# EAGLE board NanoRemotev2 (EAGLE 6.1)
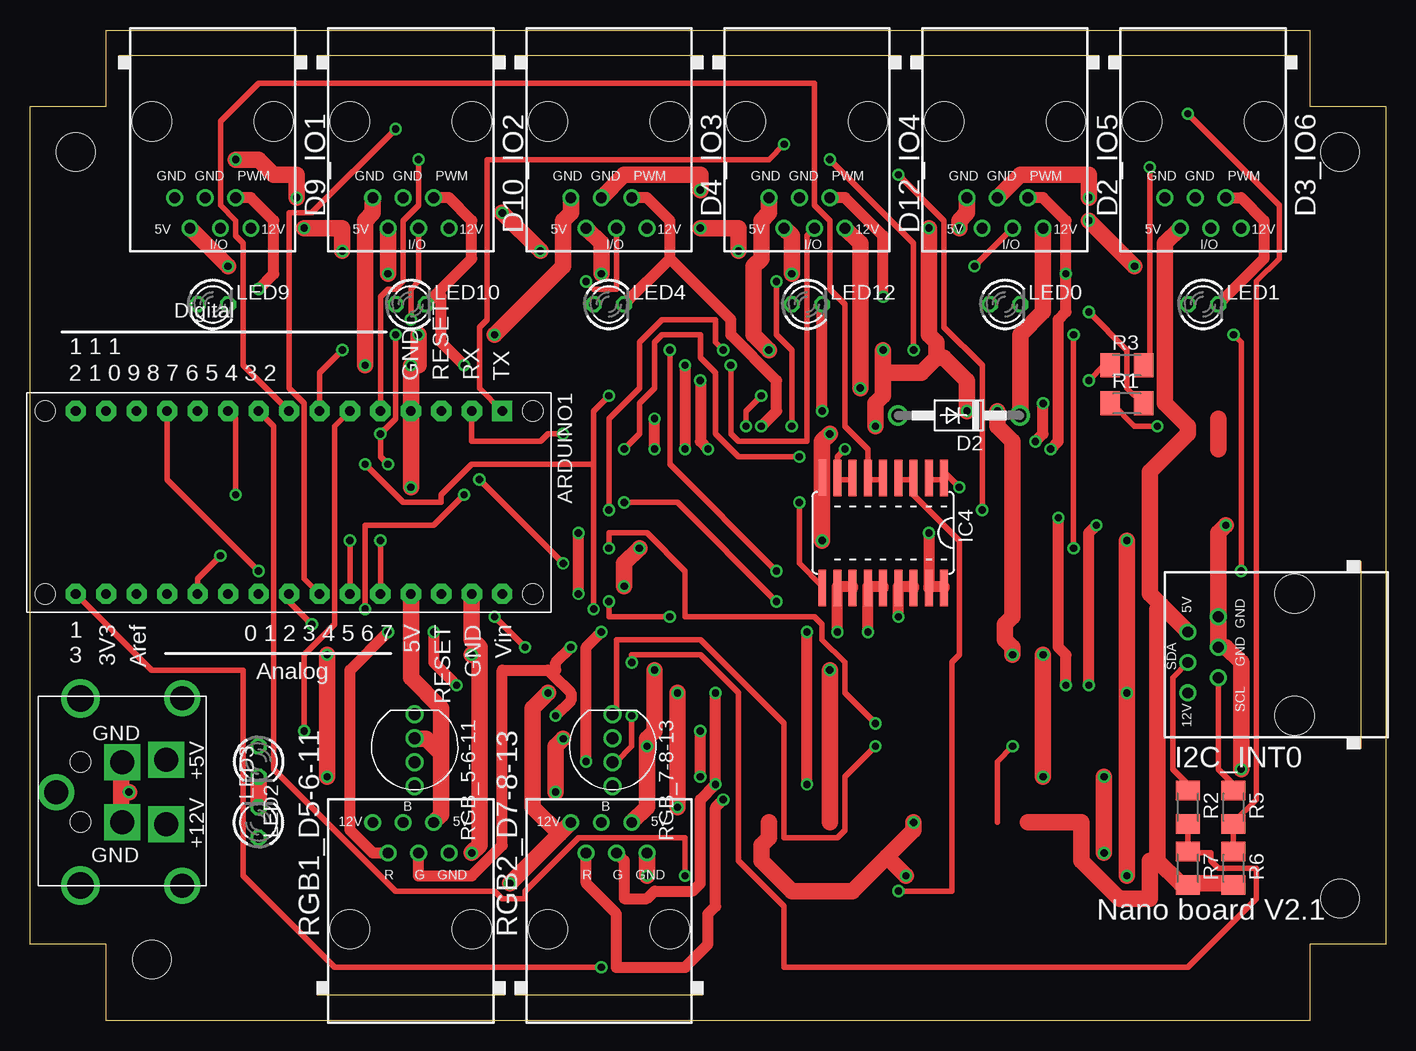
[diagram p0: board, top side]
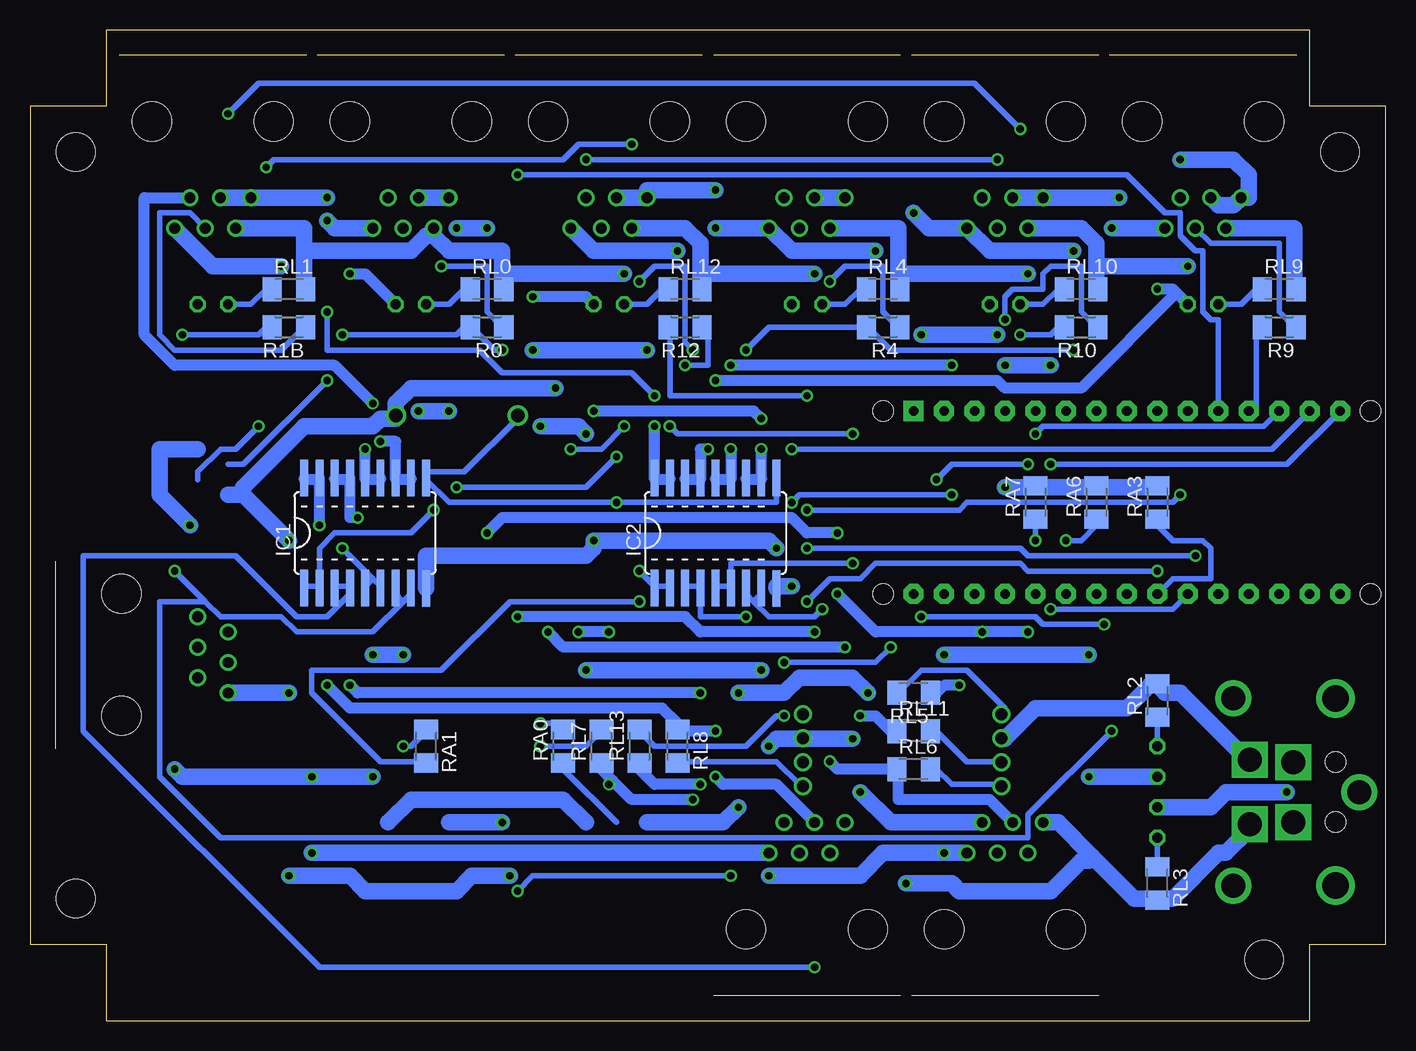
[diagram p1: board, bottom side, seen from below]

Size 113.03 x 82.55 mm. Coordinates in mm from the lower left corner, seen from the top.
Outline: 6.35,82.55 106.68,82.55 106.68,76.2 113.03,76.2 113.03,6.35 106.68,6.35 106.68,0 6.35,0 6.35,6.35 0,6.35 0,76.2 6.35,76.2 6.35,82.55
Copper layers (1*16): Top 0.035mm / dielectric 1.5mm / Bottom 0.035mm
Design rules: minimum track width 10mil, minimum drill 24mil, track to track 8mil, track to pad 8mil, pad to pad 8mil, via to via 8mil, smd to smd 8mil, copper to edge 40mil, drill to drill 8mil, minimum pad ring 10mil, minimum via ring 8mil, stop-mask expansion 4mil, vias tented up to drill 0mil, thermal gap 10mil
Net classes: 0 default: width 0.457 mm; 1 power: width 0.914 mm; 2 highpower: width 1.372 mm
Holes 3.2 mm at 3.81,72.39 10.16,5.08 109.22,10.16 109.22,72.39
Milling: 12 lines

## Footprints (pad centres in the part's own frame; a part is rotated, then mirrored left to right if it is on the bottom)
ARDUINO_NANO = drill 0.8 pad 1.676 square: 1 0,-2.54 | drill 0.8 pad 1.676 octagon: 2 0,-5.08; 3 0,-7.62; 4 0,-10.16; 5 0,-12.7; 6 0,-15.24; 7 0,-17.78; 8 0,-20.32; 9 0,-22.86; 10 0,-25.4; 11 0,-27.94; 12 0,-30.48; 13 0,-33.02; 14 0,-35.56; 15 0,-38.1; 16 15.24,-38.1; 17 15.24,-35.56; 18 15.24,-33.02; 19 15.24,-30.48; 20 15.24,-27.94; 21 15.24,-25.4; 22 15.24,-22.86; 23 15.24,-20.32; 24 15.24,-17.78; 25 15.24,-15.24; 26 15.24,-12.7; 27 15.24,-10.16; 28 15.24,-7.62; 29 15.24,-5.08; 30 15.24,-2.54 | hole 1.676: 0,0; 0,-40.64; 15.24,-40.64; 15.24,0
DO41-10 = drill 1.118: A 5.08,0; C -5.08,0
RJ12-STRAIGHT = drill 0.9 pad 1.4: +5V 1.905,8.89; +12V -3.175,8.89; GND1 3.175,6.35; GND2 0.635,6.35; I/O -0.635,8.89; PWM -1.905,6.35 | hole 3.251: -5.08,0; 5.08,0
RJ12-STRAIGHT-I2C = drill 0.9 pad 1.4: +5V 1.905,8.89; +12V -3.175,8.89; GND1 3.175,6.35; GND2 0.635,6.35; SCL -1.905,6.35; SDA -0.635,8.89 | hole 3.251: -5.08,0; 5.08,0
SO18W = smd 0.66 x 3.048: 1 -5.08,-4.585; 2 -3.81,-4.585; 3 -2.54,-4.585; 4 -1.27,-4.585; 5 0,-4.585; 6 1.27,-4.585; 7 2.54,-4.585; 8 3.81,-4.585; 9 5.08,-4.623; 10 5.08,4.585; 11 3.81,4.585; 12 2.54,4.585; 13 1.27,4.585; 14 0,4.585; 15 -1.27,4.585; 16 -2.54,4.585; 17 -3.81,4.585; 18 -5.08,4.585
LED3MM = drill 0.813 octagon: A -1.27,0; K 1.27,0
M1206 = smd 1.6 x 2: 1 -1.4,0; 2 1.4,0
RJ12-STRAIGHT-RGB = drill 0.9 pad 1.4: +5V 1.905,8.89; +12V -3.175,8.89; B -0.635,8.89; G 0.635,6.35; GND1 3.175,6.35; R -1.905,6.35 | hole 3.251: -5.08,0; 5.08,0
LED-TRICOLOR-THROUGHHOLE = drill 1: BLU 3,0; GND -1,0; GRN 1,0; RED -3,0
KPJX-4S-S = drill 2 square: +5V 2.7,1.35; +12V -2.7,1.35; GND1 -2.5,5; GND2 2.5,5 | drill 2: P$1 -7.8,0; P$2 7.8,0; P$11 0,10.5 | drill 2.2: P$3 -7.8,8.5; P$4 7.8,8.5 | hole 1.7: -2.5,8.5; 2.5,8.5

## Placement (x,y rotation side)
ARDUINO1  ARDUINO_NANO  [ARDUINO_NANO]  41.91,50.8 270 top
D2  1N4004  [DO41-10]  77.44,50.43 180 top
D2_IO5  IO5  [RJ12-STRAIGHT]  81.28,74.93 180 top
D3_IO6  IO6  [RJ12-STRAIGHT]  97.79,74.93 180 top
D4_IO3  IO3  [RJ12-STRAIGHT]  48.26,74.93 180 top
D9_IO1  IO1  [RJ12-STRAIGHT]  15.24,74.93 180 top
D10_IO2  IO2  [RJ12-STRAIGHT]  31.75,74.93 180 top
D12_IO4  IO4  [RJ12-STRAIGHT]  64.77,74.93 180 top
I2C_INT0  I2C  [RJ12-STRAIGHT-I2C]  105.41,30.48 90 top
IC1  ULN2803A  [SO18W]  85.09,40.64 0 bottom
IC2  ULN2803A  [SO18W]  55.88,40.64 0 bottom
IC4  ULN2803A  [SO18W]  71.12,40.64 180 top
LED0  [LED3MM]  81.28,59.69 0 top
LED1  [LED3MM]  97.79,59.69 0 top
LED2  [LED3MM]  19.05,21.59 270 top
LED3  [LED3MM]  19.05,16.51 90 top
LED4  [LED3MM]  48.26,59.69 0 top
LED9  [LED3MM]  15.24,59.69 0 top
LED10  [LED3MM]  31.75,59.69 0 top
LED12  [LED3MM]  64.77,59.69 0 top
R0  1K  [M1206]  74.93,57.78 180 bottom
R1  1K  [M1206]  91.44,51.44 0 top
R1B  1K  [M1206]  91.44,57.78 180 bottom
R2  1K  [M1206]  96.52,17.78 270 top
R3  1K  [M1206]  91.44,54.61 0 top
R4  1K  [M1206]  41.91,57.78 180 bottom
R5  1K  [M1206]  100.33,17.78 270 top
R6  10K  [M1206]  100.33,12.7 270 top
R7  10K  [M1206]  96.52,12.7 270 top
R9  1K  [M1206]  8.89,57.78 180 bottom
R10  1K  [M1206]  25.4,57.78 180 bottom
R12  1K  [M1206]  58.42,57.78 180 bottom
RA0  1K  [M1206]  68.58,22.86 90 bottom
RA1  1K  [M1206]  80.01,22.86 270 bottom
RA3  10K  [M1206]  19.05,43.18 90 bottom
RA6  10K  [M1206]  24.13,43.18 90 bottom
RA7  10K  [M1206]  29.21,43.18 90 bottom
RGB1_D5-6-11  RGB1  [RJ12-STRAIGHT-RGB]  31.75,7.62 0 top
RGB2_D7-8-13  RGB2  [RJ12-STRAIGHT-RGB]  48.26,7.62 0 top
RGB_5-6-11  [LED-TRICOLOR-THROUGHHOLE]  32.07,22.54 270 top
RGB_7-8-13  [LED-TRICOLOR-THROUGHHOLE]  48.58,22.54 270 top
RL0  1K  [M1206]  74.93,60.96 0 bottom
RL1  1K  [M1206]  91.44,60.96 0 bottom
RL2  1K  [M1206]  19.05,26.67 90 bottom
RL3  1K  [M1206]  19.05,11.43 270 bottom
RL4  1K  [M1206]  41.91,60.96 0 bottom
RL5  1K  [M1206]  39.37,27.3 180 bottom
RL6  1K  [M1206]  39.37,20.95 0 bottom
RL7  1K  [M1206]  65.41,22.86 90 bottom
RL8  1K  [M1206]  59.05,22.86 270 bottom
RL9  1K  [M1206]  8.89,60.96 0 bottom
RL10  1K  [M1206]  25.4,60.96 0 bottom
RL11  1K  [M1206]  39.37,24.13 0 bottom
RL12  1K  [M1206]  58.42,60.96 0 bottom
RL13  1K  [M1206]  62.23,22.86 90 bottom
U$1  KPJX-4S-S  [KPJX-4S-S]  12.7,19.05 90 top

## Library data of the parts
ARDUINO1 = arduino
D2 = diode
D2_IO5 D3_IO6 D4_IO3 D9_IO1 D10_IO2 D12_IO4 I2C_INT0 IC1 IC2 IC4 LED0 LED1-LED4 LED9 LED10 LED12 RGB1_D5-6-11 RGB2_D7-8-13 RGB_5-6-11 RGB_7-8-13 U$1 = lpatiny
R0 R1 R1B R2-R7 R9 R10 R12 RA0 RA1 RA3 RA6 RA7 RL0 RL1-RL13 = resistor

## Nets
3V3: ARDUINO1.17
+5V [highpower]: ARDUINO1.27 D2_IO5.+5V D3_IO6.+5V D4_IO3.+5V D9_IO1.+5V D10_IO2.+5V D12_IO4.+5V I2C_INT0.+5V R6.2 R7.2 RGB1_D5-6-11.+5V RGB2_D7-8-13.+5V RGB_5-6-11.GND RGB_7-8-13.GND RL0.2 RL1.2 RL2.2 RL4.2 RL9.2 RL10.2 RL12.2 U$1.+5V
+12V [highpower]: D2.C D2_IO5.+12V D3_IO6.+12V D4_IO3.+12V D9_IO1.+12V D10_IO2.+12V D12_IO4.+12V I2C_INT0.+12V RGB1_D5-6-11.+12V RGB2_D7-8-13.+12V RL3.2 U$1.+12V
A0: ARDUINO1.19
A1: ARDUINO1.20 RA0.2
A2: ARDUINO1.21 RA1.2
COM: D2.A IC1.10 IC2.10 IC4.10
D2: ARDUINO1.5 IC1.5 IC1.6 R0.2
D2B: D4_IO3.I/O R4.1
D2B1: D9_IO1.I/O R9.1
D2B2: D10_IO2.I/O R10.1
D2B3: D12_IO4.I/O R12.1
D2B4: I2C_INT0.SDA R2.1
D2B5: R3.1
D2B6: D2_IO5.I/O R0.1
D2B7: D3_IO6.I/O R1B.1
D2B8: RA0.1
D2B9: RA1.1
D3: ARDUINO1.6 IC1.7 IC1.8 R1B.2
D4: ARDUINO1.7 IC2.1 IC2.2 R4.2
D5: ARDUINO1.8 IC4.5 IC4.6
D6: ARDUINO1.9 IC4.3 IC4.4
D7: ARDUINO1.10 IC4.7 IC4.8
D8: ARDUINO1.11 IC1.1 IC1.2
D9: ARDUINO1.12 IC2.3 IC2.4 R9.2
D10: ARDUINO1.13 IC2.5 IC2.6 R10.2
D11: ARDUINO1.14 IC4.1 IC4.2
D12: ARDUINO1.15 IC2.7 IC2.8 R12.2
D13: ARDUINO1.16 IC1.3 IC1.4
GND [highpower]: ARDUINO1.4 ARDUINO1.29 D2_IO5.GND1 D2_IO5.GND2 D3_IO6.GND1 D3_IO6.GND2 D4_IO3.GND1 D4_IO3.GND2 D9_IO1.GND1 D9_IO1.GND2 D10_IO2.GND1 D10_IO2.GND2 D12_IO4.GND1 D12_IO4.GND2 I2C_INT0.GND1 I2C_INT0.GND2 IC1.9 IC2.9 IC4.9 LED2.K LED3.K RA3.2 RA6.2 RA7.2 RGB1_D5-6-11.GND1 RGB2_D7-8-13.GND1 U$1.GND1 U$1.GND2
N$1: RGB_5-6-11.RED RL5.2
N$2: RGB_5-6-11.BLU RL6.2
N$3 [power]: IC1.17 IC1.18 RGB2_D7-8-13.B RL8.1
N$4: RGB_5-6-11.GRN RL11.2
N$5 [power]: IC4.17 IC4.18 RGB1_D5-6-11.R RL5.1
N$6 [power]: IC4.15 IC4.16 RGB1_D5-6-11.B RL6.1
N$7: R1.1
N$8: I2C_INT0.SCL R5.1
N$9: RGB_7-8-13.RED RL7.2
N$11: RGB_7-8-13.BLU RL8.2
N$12: LED9.A RL9.1
N$13: LED3.A RL3.1
N$14: RGB_7-8-13.GRN RL13.2
N$15: LED4.A RL4.1
N$16: ARDUINO1.22 RA3.1
N$17 [power]: IC4.13 IC4.14 RGB1_D5-6-11.G RL11.1
N$18 [power]: D4_IO3.PWM IC2.17 IC2.18 LED4.K
N$19 [power]: IC4.11 IC4.12 RGB2_D7-8-13.R RL7.1
N$20: ARDUINO1.25 RA6.1
N$21: LED10.A RL10.1
N$22: ARDUINO1.26 RA7.1
N$23: LED2.A RL2.1
N$24 [power]: D10_IO2.PWM IC2.13 IC2.14 LED10.K
N$28: LED12.A RL12.1
N$29 [power]: IC1.15 IC1.16 RGB2_D7-8-13.G RL13.1
N$35 [power]: D3_IO6.PWM IC1.11 IC1.12 LED1.K
N$38: LED0.A RL0.1
N$40 [power]: D2_IO5.PWM IC1.13 IC1.14 LED0.K
N$41: LED1.A RL1.1
N$42 [power]: D9_IO1.PWM IC2.15 IC2.16 LED9.K
N$44 [power]: D12_IO4.PWM IC2.11 IC2.12 LED12.K
RX: ARDUINO1.2 R1.2
SCL: ARDUINO1.24 R5.2 R6.1
SDA: ARDUINO1.23 R2.2 R7.1
TX: ARDUINO1.1 R3.2

## Tracks (layer width: path | path; a pad name or v marks a point on that pad's centre or on a via)
+5V  (via drill 0.61)  (2 unrouted)
  Top 1.372: RGB2_D7-8-13.+5V 51.44,17.78 v51.44,22.86 51.44,23.5 52.07,24.13 v52.07,29.21 | RGB1_D5-6-11.+5V 34.29,17.14 34.29,22.23 | 34.29,22.23 33.02,23.5 32.38,23.5 RGB_5-6-11.GND | ARDUINO1.27 31.75,28.57 34.29,26.04 34.29,22.23 | v44.45,23.5 43.82,22.86 v43.82,19.05 | v16.51,62.87 D9_IO1.+5V | D4_IO3.+5V 47.62,64.77 v47.62,62.23 | v29.84,62.23 D10_IO2.+5V | R6.2 100.33,11.43 96.52,11.43 R7.2 95.88,11.43 93.98,13.34 | 94.3,34.61 93.34,35.56 93.34,45.72 96.52,48.9 96.52,49.53 94.61,51.44 94.61,64.77 D3_IO6.+5V | 94.3,34.61 I2C_INT0.+5V | 93.98,13.34 93.98,34.29 94.3,34.61 | 83.19,16.51 87.63,16.51 87.63,13.34 90.8,10.16 93.34,10.16 93.34,13.34 93.98,13.34 | D12_IO4.+5V 63.5,65.41 v63.5,62.23 | v66.67,29.21 66.67,16.51
  Bottom 1.372: U$1.+5V 11.43,22.23 12.06,22.23 17.14,27.3 18.41,27.3 19.05,27.94 RL2.2 19.68,27.94 21.59,26.04 29.21,26.04 31.75,23.5 RGB_5-6-11.GND | v51.44,22.86 50.8,23.5 48.9,23.5 RGB_7-8-13.GND 48.26,23.5 v44.45,23.5 | v43.82,19.05 41.28,16.51 RGB1_D5-6-11.+5V | D9_IO1.+5V 7.62,66.04 7.62,60.96 RL9.2 | 24.13,62.87 24.13,64.77 25.4,66.04 D10_IO2.+5V | 24.13,62.87 24.13,60.96 RL10.2 | 24.13,62.87 v16.51,62.87 | 40.64,62.23 40.64,66.04 D4_IO3.+5V | 40.64,62.23 40.64,60.96 RL4.2 | 57.15,62.23 57.15,64.77 58.42,66.04 D12_IO4.+5V | 57.15,62.23 57.15,60.96 RL12.2 | 57.15,62.23 v47.62,62.23 | 40.64,62.23 v29.84,62.23 | 73.66,62.23 73.66,64.14 78.1,64.14 79.38,65.41 | 73.66,62.23 73.66,60.96 RL0.2 | 79.38,65.41 D2_IO5.+5V | 90.17,64.14 90.17,66.04 D3_IO6.+5V | 90.17,64.14 90.17,60.96 RL1.2 | 79.38,65.41 80.01,65.41 81.28,64.14 90.17,64.14 | 66.67,16.51 68.58,18.41 81.28,18.41 83.19,16.51 | 73.66,62.23 v63.5,62.23 | v52.07,29.21 v66.67,29.21
+12V  (via drill 0.61)  (1 unrouted)
  Top 1.372: v40.01,11.43 44.13,15.56 | 44.13,15.56 RGB2_D7-8-13.+12V | v22.86,66.04 26.04,66.04 v26.04,64.14 | v42.55,64.14 v39.37,67.31 | 61.6,16.51 61.6,15.24 60.96,14.61 60.96,13.34 63.5,10.79 68.58,10.79 71.44,13.65 | 71.44,13.65 73.66,15.88 v73.66,16.51 | v91.44,40.01 v91.44,27.3 v91.44,12.06 | D12_IO4.+12V 69.21,64.77 v69.21,52.7 | D2_IO5.+12V 84.45,59.05 82.55,57.15 82.55,50.8 D2.C | v88.27,66.67 v92.08,62.87 | 71.44,13.65 v73.02,12.06 | v55.88,66.04 59.05,66.04 v59.05,64.14 | v43.18,27.3 41.91,26.04 41.91,17.78 44.13,15.56 | v53.98,27.3 v53.98,17.78
  Bottom 1.372: 24.45,13.65 27.3,16.51 RGB1_D5-6-11.+12V | 24.45,13.65 20.95,10.16 19.05,10.16 RL3.2 18.41,10.16 17.78,10.16 13.97,13.97 13.33,13.97 11.43,15.88 U$1.+12V | v40.01,11.43 36.2,11.43 35.56,10.79 27.94,10.79 25.4,13.34 24.77,13.34 24.45,13.65 | v22.86,66.04 D9_IO1.+12V | v26.04,64.14 33.02,64.14 D10_IO2.+12V 38.1,66.04 v39.37,67.31 | v42.55,64.14 49.53,64.14 D4_IO3.+12V v55.88,66.04 | v73.66,16.51 78.1,16.51 | v91.44,27.3 I2C_INT0.+12V | v91.44,40.01 95.25,43.81 | 95.25,43.81 96.52,43.81 | v69.21,52.7 81.28,52.7 82.55,51.44 82.55,50.8 D2.C 82.55,50.16 83.82,50.16 84.45,49.53 90.17,49.53 95.25,44.45 95.25,43.81 | D3_IO6.+12V 97.79,62.87 v92.08,62.87 | v88.27,66.67 87.63,66.04 D2_IO5.+12V | v73.02,12.06 76.2,12.06 77.47,10.79 85.09,10.79 86.36,12.06 v91.44,12.06 | v59.05,64.14 66.04,64.14 D12_IO4.+12V | v43.18,27.3 44.45,28.57 48.9,28.57 50.17,27.3 v53.98,27.3 | v53.98,17.78 55.25,16.51 61.6,16.51
A1  (via drill 0.61)
  Top 0.457: v70.48,24.77 67.94,27.3 67.94,29.84 66.04,31.75 66.04,33.02 65.41,33.66 54.61,33.66 54.61,37.47 51.44,40.64 48.26,40.64 v48.26,39.37 | v15.88,38.73 13.97,36.83 ARDUINO1.20
  Bottom 0.457: v70.48,24.77 68.58,24.77 RA0.2 | v48.26,39.37 30.48,39.37 29.84,38.73 v15.88,38.73
A2  (via drill 0.61)
  Top 0.457: v62.23,34.92 53.98,43.18 v49.53,43.18 | v36.2,43.81 33.66,41.27 27.94,41.27 v27.94,34.29
  Bottom 0.457: v62.23,34.92 73.02,34.92 78.74,29.21 89.53,29.21 89.53,27.3 83.82,21.59 80.01,21.59 RA1.2 | v49.53,43.18 48.9,43.81 v36.2,43.81 | v27.94,34.29 17.78,34.29 ARDUINO1.21
COM  (via drill 0.61)
  Top 0.457: v64.14,43.18 64.14,38.1 66.04,36.2 IC4.10
  Bottom 0.457: IC2.10 50.8,43.18 v64.14,43.18 78.1,43.18 80.01,45.09 IC1.10 80.01,45.72 76.83,45.72 72.39,50.16 D2.A
D2  (via drill 0.61)
  Top 0.457: v86.99,57.15 v86.99,39.37 | ARDUINO1.5 29.21,60.33 29.84,60.96 30.48,60.96 31.11,61.59 31.11,66.67 32.38,67.94 v32.38,71.75 | v66.67,71.75 73.66,64.77 v73.66,55.88
  Bottom 0.457: v86.99,57.15 77.47,57.15 76.83,57.78 R0.2 76.2,57.78 74.3,55.88 v73.66,55.88 | 84.45,36.83 83.82,36.2 IC1.6 | v86.99,39.37 84.45,36.83 | 84.45,36.83 85.09,36.2 IC1.5 | v32.38,71.75 v66.67,71.75
D2B  (via drill 0.61)
  Top 0.457: v46.36,61.59 46.99,60.96 48.9,60.96 D4_IO3.I/O
  Bottom 0.457: v46.36,61.59 45.09,62.87 41.91,62.87 41.91,59.05 40.64,57.78 R4.1
D2B1
  Bottom 0.457: D9_IO1.I/O 14.61,64.77 8.89,64.77 8.89,59.05 7.62,57.78 R9.1
D2B2  (via drill 0.61)
  Top 0.457: v31.75,58.42 31.75,60.96 32.38,61.59 D10_IO2.I/O
  Bottom 0.457: v31.75,58.42 31.75,60.33 31.11,60.96 28.57,60.96 28.57,62.23 27.94,62.87 25.4,62.87 25.4,59.05 24.13,57.78 R10.1
D2B3  (via drill 0.61)
  Top 0.457: v58.42,54.61 58.42,48.9 59.05,48.26 64.77,48.26 64.77,65.41 D12_IO4.I/O
  Bottom 0.457: v58.42,54.61 56.52,54.61 56.52,57.78 R12.1
D2B4
  Top 0.457: I2C_INT0.SDA 95.25,28.57 95.25,20.95 96.52,19.68 R2.1
D2B5  (via drill 0.61)
  Top 0.457: v88.27,53.34 89.53,54.61 R3.1
  Bottom 0.457: v88.27,53.34 95.25,46.35 96.52,46.35
D2B6  (via drill 0.61)
  Top 0.457: v78.74,62.87 D2_IO5.I/O
  Bottom 0.457: v78.74,62.87 74.93,62.87 74.93,59.05 73.66,57.78 R0.1
D2B7
  Bottom 0.457: D3_IO6.I/O 99.69,67.31 102.23,67.31 102.23,57.15 100.96,55.88 92.08,55.88 90.17,57.78 R1B.1
D2B8
  Bottom 0.457: 64.14,16.51 68.58,20.95 RA0.1
D2B9  (via drill 0.61)
  Top 0.457: v81.91,22.86 80.64,21.59 80.64,16.51
  Bottom 0.457: v81.91,22.86 81.28,22.86 80.01,24.13 RA1.1
D3  (via drill 0.61)
  Top 0.457: v100.33,57.15 100.96,56.52 v100.96,37.47 | ARDUINO1.6 25.4,49.53 25.4,33.02 22.86,30.48 v22.86,24.13
  Bottom 0.457: v100.33,57.15 93.98,57.15 93.34,57.78 R1B.2 | 98.42,34.92 97.16,33.66 92.08,33.66 90.8,32.38 84.45,32.38 81.91,34.92 | 98.42,34.92 v100.96,37.47 | 81.91,34.92 81.28,35.56 IC1.8 | 81.91,34.92 82.55,35.56 IC1.7 | v22.86,24.13 29.84,17.14 29.84,15.24 97.16,15.24 102.23,20.32 102.23,34.92 98.42,34.92
D4  (via drill 0.61)
  Top 0.457: v26.04,55.88 24.13,53.98 ARDUINO1.7 | v62.23,37.47 53.34,46.35 v53.34,55.88
  Bottom 0.457: 60.96,36.2 59.69,36.2 IC2.2 | v26.04,55.88 41.28,55.88 43.18,57.78 R4.2 51.44,57.78 v53.34,55.88 | v62.23,37.47 60.96,36.2 | 60.96,36.2 IC2.1
D5
  Top 0.457: IC4.5 71.12,45.09 69.85,45.09 IC4.6 69.85,47.62 67.94,49.53 67.94,59.69 66.67,60.96 66.67,66.67 65.41,67.94 65.41,78.11 19.05,78.11 15.88,74.93 15.88,67.94 17.14,66.67 17.14,65.41 17.78,64.77 17.78,54.61 ARDUINO1.8
D6  (via drill 0.61)
  Top 0.457: 73.66,45.09 72.39,45.09 IC4.4 | ARDUINO1.9 20.32,49.53 20.32,20.95 30.48,10.79 38.74,10.79 39.37,10.16 41.28,10.16 41.28,10.79 45.72,15.24 54.61,15.24 v54.61,12.06 | v72.39,10.79 76.83,10.79 76.83,29.84 77.47,30.48 77.47,40.01 73.66,43.81 73.66,45.09 | 73.66,45.09 IC4.3
  Bottom 0.457: v54.61,12.06 71.12,12.06 v72.39,10.79
D7  (via drill 0.61)
  Top 0.457: IC4.7 68.58,45.09 67.31,45.09 IC4.8 67.31,46.99 v67.94,47.62 | ARDUINO1.10 17.14,50.16 v17.14,43.81 | v48.26,42.55 48.26,50.16 50.8,52.7 50.8,56.52 52.71,58.42 57.15,58.42 57.15,56.52 v57.79,55.88 | v62.23,61.59 62.23,57.15 63.5,55.88 v63.5,49.53
  Bottom 0.457: v17.14,43.81 17.78,43.18 34.93,43.18 35.56,42.55 v48.26,42.55 | v57.79,55.88 58.42,56.52 58.42,62.87 60.96,62.87 v62.23,61.59 | v63.5,49.53 65.41,47.62 v67.94,47.62
D8  (via drill 0.61)
  Top 0.457: v72.39,70.48 76.2,66.67 76.2,57.78 79.38,54.61 v79.38,42.55
  Bottom 0.457: 88.9,36.2 90.17,36.2 IC1.1 | ARDUINO1.11 13.97,58.42 14.61,58.42 15.24,59.05 15.24,64.14 15.88,64.14 17.14,65.41 17.14,67.31 18.41,67.31 21.59,70.48 v72.39,70.48 | v79.38,42.55 81.28,40.64 87.63,40.64 88.9,39.37 88.9,36.2 | 88.9,36.2 IC1.2
D9  (via drill 0.61)
  Top 0.457: v53.34,33.66 48.26,33.66 v48.26,34.92 | v19.05,37.47 11.43,45.09 ARDUINO1.12
  Bottom 0.457: IC2.3 58.42,36.2 57.15,36.2 IC2.4 57.15,33.66 v53.34,33.66 | ARDUINO1.12 10.79,50.8 10.79,57.78 R9.2 | v48.26,34.92 46.36,36.83 43.82,36.83 42.55,38.1 30.48,38.1 29.84,37.47 v19.05,37.47
D10  (via drill 0.61)
  Top 0.457: v30.48,57.15 30.48,50.16 v29.21,48.9 29.21,46.99 v29.84,46.35 | v37.47,45.09 v44.45,38.1
  Bottom 0.457: 54.61,36.2 55.88,36.2 IC2.5 | v30.48,57.15 27.94,57.15 27.3,57.78 R10.2 | v29.21,48.9 28.57,49.53 10.16,49.53 ARDUINO1.13 | 54.61,36.2 54.61,38.1 v44.45,38.1 | v37.47,45.09 36.2,46.35 v29.84,46.35 | 54.61,36.2 IC2.6
D11  (via drill 0.61)
  Top 0.457: IC4.2 74.93,45.09 76.2,45.09 IC4.1 76.2,45.72 v77.47,44.45 | v49.53,47.62 50.8,48.9 50.8,51.44 52.07,52.7 52.07,56.52 52.71,57.15 55.88,57.15 55.88,55.24 57.15,53.98 57.15,48.9 59.05,46.99 v64.14,46.99
  Bottom 0.457: ARDUINO1.14 9.53,47.62 v49.53,47.62 | v64.14,46.99 66.67,44.45 v77.47,44.45
D12  (via drill 0.61)
  Top 0.457: v48.26,52.07 46.99,50.8 46.99,46.35 | 46.99,46.35 v46.99,34.29 | v27.94,46.35 31.11,43.18 34.29,43.18 34.29,43.81 36.83,46.35 46.99,46.35
  Bottom 0.457: v48.26,52.07 59.69,52.07 59.69,57.78 R12.2 | v46.99,34.29 47.62,33.66 51.44,33.66 52.71,34.92 | 52.71,34.92 53.34,35.56 IC2.7 | 52.71,34.92 52.07,35.56 IC2.8 | ARDUINO1.15 8.26,46.35 v27.94,46.35
D13  (via drill 0.61)
  Top 0.457: ARDUINO1.16 10.16,29.21 17.78,29.21 17.78,12.06 25.4,4.45 v47.62,4.45
  Bottom 0.457: IC1.3 87.63,36.2 86.36,36.2 IC1.4 86.36,35.56 88.27,33.66 90.8,33.66 95.88,38.73 108.58,38.73 108.58,24.13 88.9,4.45 v47.62,4.45
GND  (via drill 0.61)  (1 unrouted)
  Top 1.372: v31.75,44.45 ARDUINO1.4 v31.75,54.61 32.38,54.61 v32.38,57.15 | v17.14,71.75 19.05,71.75 20.32,70.48 22.22,70.48 v22.22,68.58 | v27.94,54.61 27.94,66.67 28.57,67.31 D10_IO2.GND1 | D2_IO5.GND2 82.55,70.48 88.27,70.48 v88.27,68.58 | D4_IO3.GND2 49.53,70.48 55.88,70.48 v55.88,69.22 | v49.53,36.2 49.53,38.1 v50.8,39.37 | v66.04,40.01 IC4.9 66.04,48.26 v66.67,48.9 | D12_IO4.GND1 61.6,67.31 60.96,66.67 60.96,63.5 60.33,62.87 60.33,57.15 v61.6,55.88 | 71.12,53.98 71.12,52.07 70.48,51.44 v70.48,49.53 | 71.12,53.98 v71.12,55.88 | D2_IO5.GND1 78.1,67.31 77.47,66.67 v77.47,66.04 | v74.93,66.04 74.93,57.15 75.56,56.52 75.56,55.24 | 75.56,55.24 74.3,53.98 71.12,53.98 | v38.74,57.15 44.45,62.87 44.45,66.67 45.09,67.31 D4_IO3.GND1 | 7.62,19.05 7.62,20.95 U$1.GND2 | 7.62,19.05 7.62,17.14 U$1.GND1 | LED3.K LED2.K | v36.83,13.97 37.47,14.61 37.47,30.48 | 37.47,30.48 37.47,31.11 36.83,31.75 ARDUINO1.29 | v24.77,20.32 v24.77,30.48 | v36.83,30.48 37.47,30.48 | 7.62,19.05 v8.26,19.05 | 99.06,47.62 99.06,50.16 | v99.69,41.27 99.06,40.64 I2C_INT0.GND1 I2C_INT0.GND2 99.69,31.11 100.96,29.84 v100.96,20.95 | v89.53,13.97 v89.53,20.32 | v51.44,12.06 RGB2_D7-8-13.GND1 | v78.1,50.8 78.1,53.34 76.2,55.24 75.56,55.24 | v80.64,50.8 80.64,49.53 81.91,48.26 81.91,33.66 81.28,33.02 81.28,31.75 81.91,31.11 v81.91,30.48 | v84.45,20.32 v84.45,30.48
  Bottom 1.372: RA3.2 19.05,44.45 24.13,44.45 RA6.2 24.77,44.45 29.21,44.45 RA7.2 29.84,44.45 v31.75,44.45 | D9_IO1.GND2 13.97,67.94 12.7,67.94 D9_IO1.GND1 11.43,68.58 11.43,70.48 12.7,71.75 v17.14,71.75 | D10_IO2.GND2 D10_IO2.GND1 v22.22,68.58 | v31.75,54.61 v27.94,54.61 | D2_IO5.GND1 D2_IO5.GND2 | D3_IO6.GND2 D3_IO6.GND1 v88.27,68.58 | D4_IO3.GND2 D4_IO3.GND1 | D12_IO4.GND2 D12_IO4.GND1 61.6,69.22 v55.88,69.22 | v49.53,36.2 50.8,36.2 IC2.9 | v50.8,39.37 51.44,40.01 v66.04,40.01 66.04,39.37 66.67,38.73 80.01,38.73 IC1.9 | v71.12,55.88 v61.6,55.88 | v70.48,49.53 67.31,49.53 v66.67,48.9 | v74.93,66.04 v77.47,66.04 | v38.74,57.15 v32.38,57.15 | RGB1_D5-6-11.GND1 v36.83,13.97 41.91,13.97 43.82,12.06 v51.44,12.06 | LED2.K v24.77,20.32 | v24.77,30.48 v36.83,30.48 | v8.26,19.05 13.33,19.05 14.61,17.78 LED3.K | v99.69,41.27 102.23,43.81 102.23,47.62 99.06,47.62 | RGB2_D7-8-13.GND1 62.87,13.97 65.41,13.97 67.94,13.97 79.38,13.97 81.91,13.97 84.45,13.97 v89.53,13.97 | v100.96,20.95 100.33,20.32 v89.53,20.32 v84.45,20.32 | v80.64,50.8 v78.1,50.8 | v84.45,30.48 v81.91,30.48
N$1
  Bottom 0.457: RL5.2 40.64,27.3 38.74,29.21 34.93,29.21 31.75,26.04 RGB_5-6-11.RED
N$2
  Bottom 0.457: RL6.2 37.47,20.95 36.2,19.68 32.38,19.68 RGB_5-6-11.BLU
N$3  (via drill 0.61)
  Top 0.914: v55.88,20.32 v55.88,24.13 | v88.9,41.27 88.27,40.64 v88.27,27.94
  Bottom 0.914: 88.9,45.09 90.17,45.09 IC1.18 | v55.88,24.13 59.05,24.13 RL8.1 59.05,24.77 60.33,26.04 86.36,26.04 v88.27,27.94 | v55.88,20.32 55.25,19.68 50.8,19.68 RGB2_D7-8-13.B | v88.9,41.27 88.9,45.09 | 88.9,45.09 IC1.17
N$4
  Bottom 0.457: RL11.2 37.47,24.13 34.93,21.59 32.38,21.59 RGB_5-6-11.GRN
N$5  (via drill 0.61)
  Top 0.914: 74.93,36.2 76.2,36.2 IC4.18 | v35.56,27.94 33.66,29.84 v33.66,32.38 | v29.84,32.38 26.67,29.21 26.67,15.88 28.57,13.97 RGB1_D5-6-11.R | v74.93,40.64 74.93,36.2 | v45.72,35.56 v45.72,40.64 | 74.93,36.2 IC4.17
  Bottom 0.914: v35.56,27.94 36.83,27.94 37.47,27.3 RL5.1 | v29.84,32.38 v33.66,32.38 42.55,32.38 v45.72,35.56 | v74.93,40.64 73.66,41.91 49.53,41.91 48.26,40.64 v45.72,40.64
N$6  (via drill 0.61)
  Top 0.914: IC4.16 73.66,36.2 72.39,36.2 IC4.15 v72.39,33.66 | v47.62,32.38 46.36,31.11 v46.36,21.59
  Bottom 0.914: RGB1_D5-6-11.B 33.02,18.41 40.64,18.41 40.64,20.95 RL6.1 45.72,20.95 v46.36,21.59 | v72.39,33.66 58.42,33.66 57.15,32.38 v47.62,32.38
N$7  (via drill 0.61)
  Top 0.457: v93.98,49.53 92.08,49.53 90.17,51.44 R1.1
  Bottom 0.457: v93.98,49.53 95.88,47.62 97.16,47.62 99.06,45.72 99.06,45.09
N$8
  Top 0.457: I2C_INT0.SCL 99.06,20.95 100.33,19.68 R5.1
N$9  (via drill 0.61)
  Top 0.457: v70.48,22.86 67.94,20.32 67.94,15.88 67.31,15.24 62.87,15.24 62.87,24.77 55.88,31.75 48.9,31.75 48.9,26.04 RGB_7-8-13.RED
  Bottom 0.457: v70.48,22.86 66.67,22.86 65.41,24.13 RL7.2
N$11
  Bottom 0.457: RL8.2 59.05,21.59 50.8,21.59 48.9,19.68 RGB_7-8-13.BLU
N$12
  Bottom 0.457: LED9.A 12.06,59.69 10.79,60.96 RL9.1
N$13
  Bottom 0.457: RL3.1 LED3.A
N$14  (via drill 0.61)
  Top 0.457: v50.17,25.4 50.17,22.86 48.9,21.59 RGB_7-8-13.GRN
  Bottom 0.457: v50.17,25.4 50.8,25.4 53.34,22.86 60.96,22.86 62.23,24.13 RL13.2
N$15
  Bottom 0.457: LED4.A 45.09,59.69 43.82,60.96 RL4.1
N$16
  Bottom 0.457: ARDUINO1.22 17.78,36.83 14.61,36.83 14.61,39.37 15.24,40.01 17.78,40.01 19.05,41.27 RA3.1
N$17  (via drill 0.61)
  Top 0.914: IC4.14 71.12,36.2 69.85,36.2 IC4.13 v69.85,32.38 | v43.82,25.4 45.09,26.67 45.09,27.3 43.5,28.89 | 43.5,28.89 43.18,29.21 39.37,29.21 39.37,14.61 36.83,12.06 32.38,12.06 RGB1_D5-6-11.G | v45.09,31.11 43.82,29.84 43.82,29.21 43.5,28.89
  Bottom 0.914: v43.82,25.4 42.55,25.4 41.28,24.13 RL11.1 | v69.85,32.38 68.58,31.11 v45.09,31.11
N$18  (via drill 0.61)
  Top 0.914: 53.34,63.5 LED4.K | 53.34,63.5 53.34,66.67 51.44,68.58 D4_IO3.PWM | v60.96,49.53 62.23,50.8 62.23,53.34 58.42,57.15 58.42,58.42 53.34,63.5
  Bottom 0.914: IC2.17 59.69,45.09 60.96,45.09 IC2.18 v60.96,49.53
N$19  (via drill 0.61)
  Top 0.914: IC4.12 68.58,36.2 67.31,36.2 IC4.11 v67.31,32.38 | v57.79,18.41 57.15,17.78 57.15,9.53 56.52,8.89 56.52,6.35 54.61,4.45 48.9,4.45 48.9,8.89 46.36,11.43 RGB2_D7-8-13.R | v64.77,19.68 v64.77,32.38
  Bottom 0.914: 64.45,20 62.87,18.41 v57.79,18.41 | 64.45,20 65.41,20.95 RL7.1 | v64.77,32.38 v67.31,32.38 | 64.45,20 v64.77,19.68
N$20  (via drill 0.61)
  Top 0.457: ARDUINO1.25 v26.67,40.01
  Bottom 0.457: v26.67,40.01 25.4,40.01 24.13,41.27 RA6.1
N$21
  Bottom 0.457: LED10.A 28.57,59.69 27.3,60.96 RL10.1
N$22  (via drill 0.61)
  Top 0.457: ARDUINO1.26 v29.21,40.01
  Bottom 0.457: v29.21,40.01 RA7.1
N$23
  Bottom 0.457: LED2.A RL2.1
N$24  (via drill 0.61)
  Top 0.914: 33.97,60.64 36.83,63.5 36.83,66.67 34.93,68.58 D10_IO2.PWM | 33.97,60.64 LED10.K | v54.61,54.61 v54.61,47.62 | v36.2,54.61 34.29,56.52 34.29,60.33 33.97,60.64
  Bottom 0.914: IC2.14 55.88,45.09 54.61,45.09 IC2.13 v54.61,47.62 | v36.2,54.61 v54.61,54.61
N$28
  Bottom 0.457: LED12.A 61.6,59.69 60.33,60.96 RL12.1
N$29  (via drill 0.61)
  Top 0.914: RGB2_D7-8-13.G 49.53,13.34 49.53,10.16 51.44,10.16 52.07,10.79 55.25,10.79 55.88,11.43 55.88,18.41 v57.15,19.68 v57.15,27.3 | v85.72,41.91 85.72,31.11 86.36,30.48 v86.36,27.94
  Bottom 0.914: 86.36,45.09 87.63,45.09 IC1.16 | v57.15,19.68 60.96,19.68 62.23,20.95 RL13.1 | 86.36,45.09 86.36,41.91 v85.72,41.91 | v86.36,27.94 85.72,27.3 v57.15,27.3 | 86.36,45.09 IC1.15
N$35  (via drill 0.61)
  Top 0.914: LED1.K 102.87,63.5 102.87,66.67 100.96,68.58 D3_IO6.PWM | v83.82,48.26 84.45,48.9 v84.45,51.44
  Bottom 0.914: IC1.11 81.28,45.09 82.55,45.09 IC1.12 82.55,48.26 v83.82,48.26 | v84.45,51.44 87.63,54.61 100.96,54.61 103.5,57.15 103.5,68.58 D3_IO6.PWM
N$38
  Bottom 0.457: LED0.A 78.1,59.69 76.83,60.96 RL0.1
N$40  (via drill 0.61)
  Top 0.914: D2_IO5.PWM 84.45,68.58 86.36,66.67 v86.36,62.23 86.36,59.05 85.72,58.42 85.72,48.26 v85.09,47.62
  Bottom 0.914: IC1.13 83.82,45.09 85.09,45.09 IC1.14 v85.09,47.62 | LED0.K 85.09,62.23 v86.36,62.23
N$41
  Bottom 0.457: LED1.A 94.61,59.69 93.34,60.96 RL1.1
N$42  (via drill 0.61)
  Top 0.914: v19.05,60.96 20.32,62.23 20.32,66.67 18.41,68.58 D9_IO1.PWM | v56.52,47.62 55.88,48.26 v55.88,53.34
  Bottom 0.914: IC2.16 58.42,45.09 57.15,45.09 IC2.15 57.15,47.62 v56.52,47.62 | 17.46,60.64 17.78,60.96 v19.05,60.96 | LED9.K 17.46,60.64 | v55.88,53.34 32.38,53.34 31.75,52.7 25.4,52.7 17.46,60.64
N$44  (via drill 0.61)
  Top 0.914: v71.12,60.33 71.12,65.41 67.94,68.58 D12_IO4.PWM | v52.07,47.62 v52.07,50.16 | v66.04,50.8 LED12.K
  Bottom 0.914: IC2.12 53.34,45.09 52.07,45.09 IC2.11 v52.07,47.62 | LED12.K 66.67,60.33 v71.12,60.33 | v52.07,50.16 52.71,50.8 v66.04,50.8
RX  (via drill 0.61)
  Top 0.457: v88.27,59.05 91.44,55.88 91.44,52.7 92.71,51.44 R1.2 | v60.96,52.07 59.69,50.8 v59.69,49.53 | v44.45,48.9 43.18,48.9 42.55,48.26 36.83,48.26 ARDUINO1.2
  Bottom 0.457: v88.27,59.05 88.27,55.88 75.56,55.88 73.66,53.98 62.87,53.98 v60.96,52.07 | v59.69,49.53 59.05,48.9 v44.45,48.9
SCL  (via drill 0.61)
  Top 0.457: R6.1 R5.2 100.33,16.51 102.23,18.41 102.23,61.59 104.14,63.5 104.14,67.94 v96.52,75.56 | v30.48,74.3 23.5,67.31 21.59,67.31 21.59,52.7 22.86,51.44 22.86,36.83 ARDUINO1.24
  Bottom 0.457: v96.52,75.56 93.98,78.11 34.29,78.11 v30.48,74.3
SDA  (via drill 0.61)
  Top 0.457: R2.2 R7.1 96.52,13.97 98.42,13.97 98.42,13.34 99.06,12.7 102.23,12.7 102.23,10.16 96.52,4.45 62.87,4.45 62.87,9.53 59.05,13.34 59.05,27.3 55.88,30.48 50.17,30.48 v50.17,29.84 | v38.74,33.66 v41.28,31.11 | v23.5,33.02 21.59,34.92 ARDUINO1.23
  Bottom 0.457: v50.17,29.84 42.55,29.84 v41.28,31.11 | v38.74,33.66 29.21,33.66 28.57,33.02 v23.5,33.02
TX  (via drill 0.61)
  Top 0.457: v93.34,71.12 93.34,54.61 R3.2 | v62.87,73.03 61.6,71.75 38.1,71.75 38.1,58.42 37.47,57.78 37.47,52.7 ARDUINO1.1
  Bottom 0.457: v93.34,71.12 92.71,71.75 68.58,71.75 67.31,73.03 v62.87,73.03

## Text on the board
tPlace: Nano board V2.1